# Altium PCB PCB2.PcbDoc
Units mm, origin at the board's own origin, x right, y up, seen from the top; angles counter-clockwise.
Board outline 26.77 x 16.38 mm, 2 copper layers (Top Layer, Bottom Layer); 25 components, 41 nets, 143 pads, 70 vias.
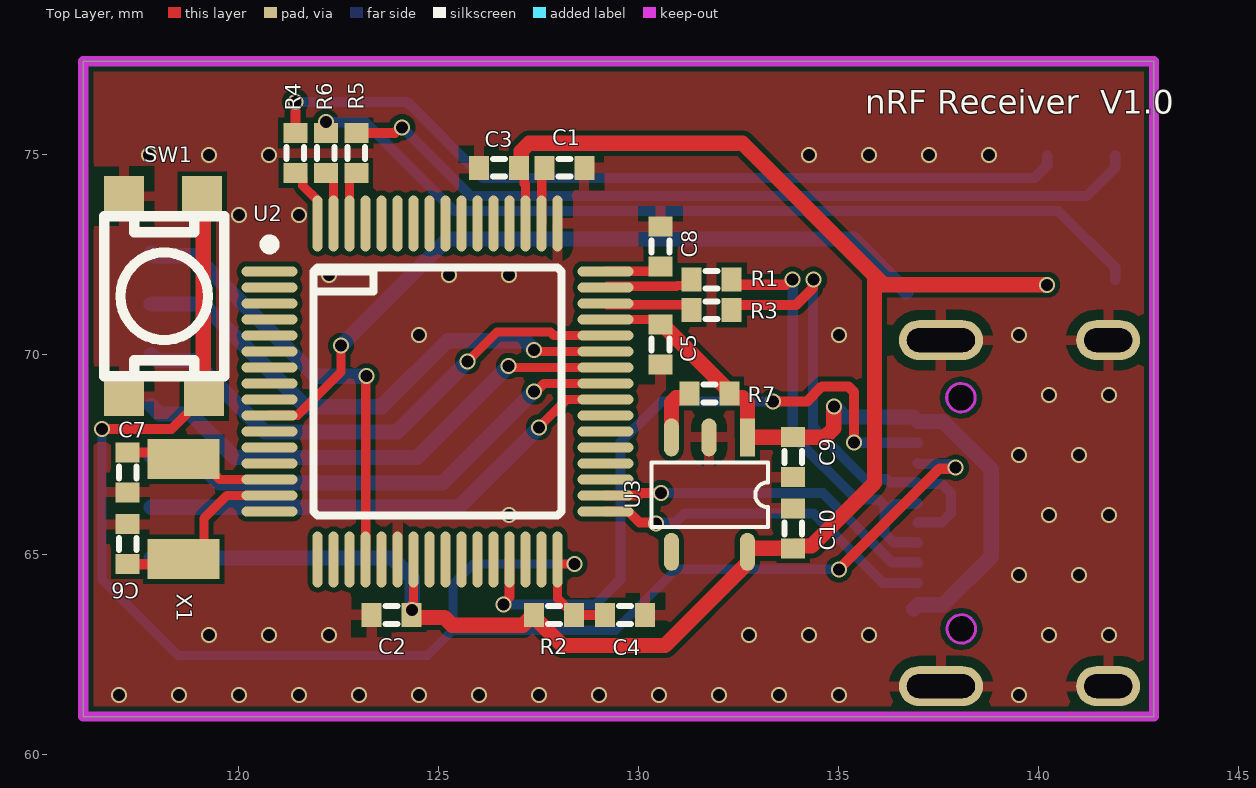
[diagram p0: Top Layer view]
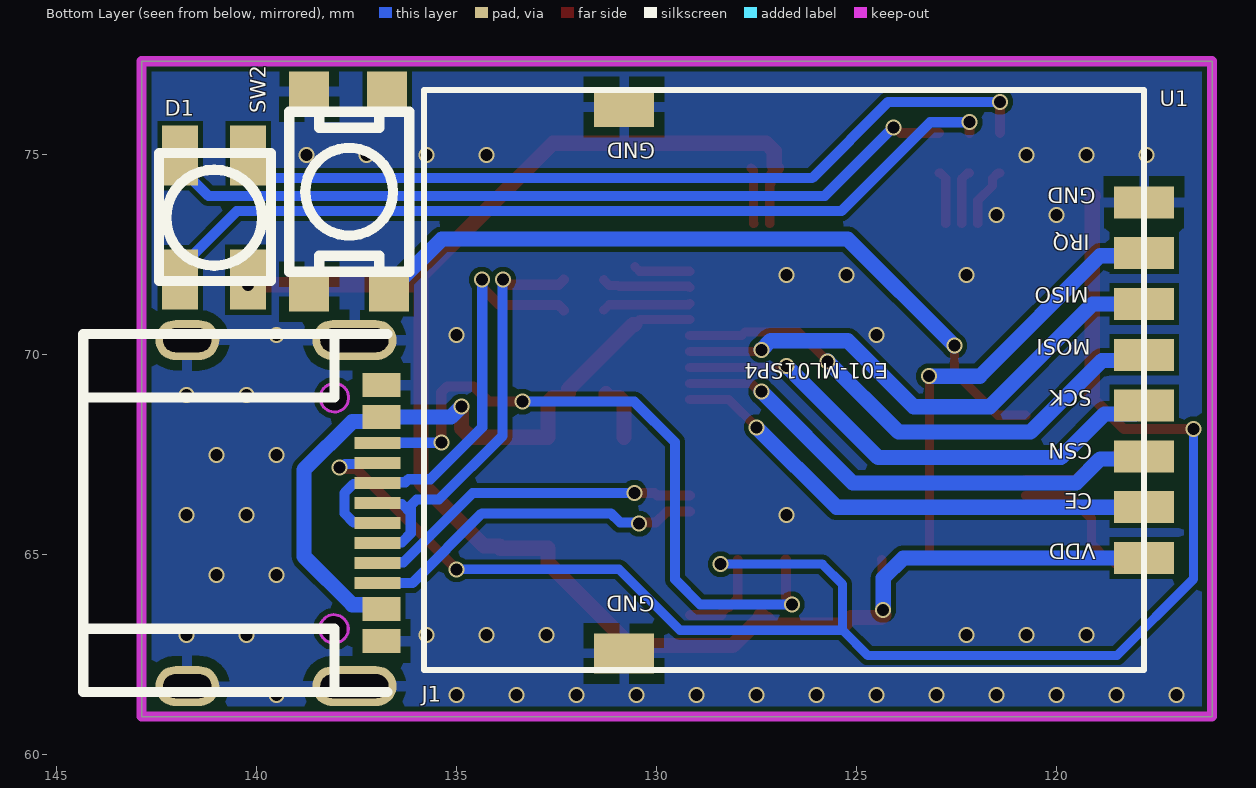
[diagram p1: Bottom Layer view, seen from below]
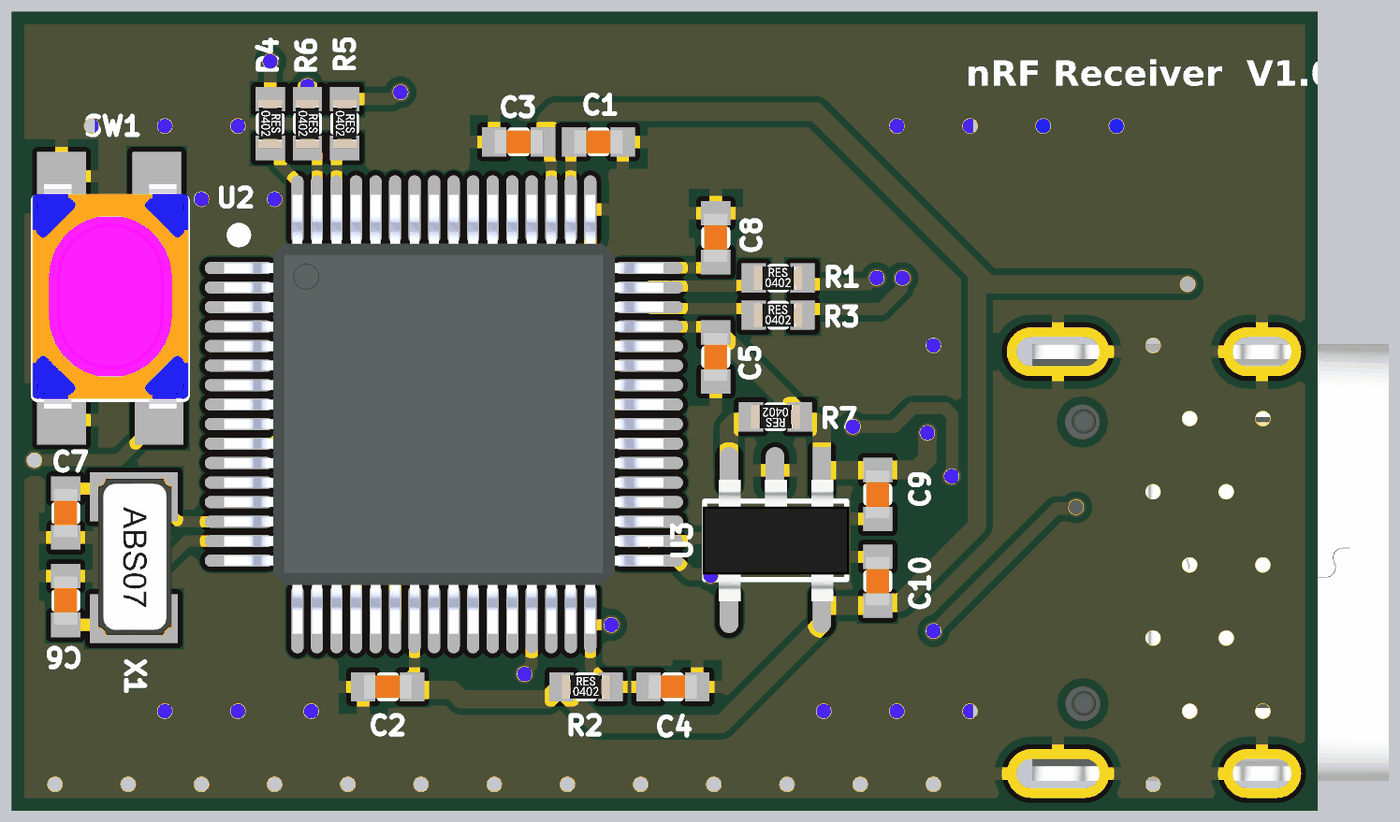
[diagram p2: 3D render of the assembled board from above, using the file's embedded part models]
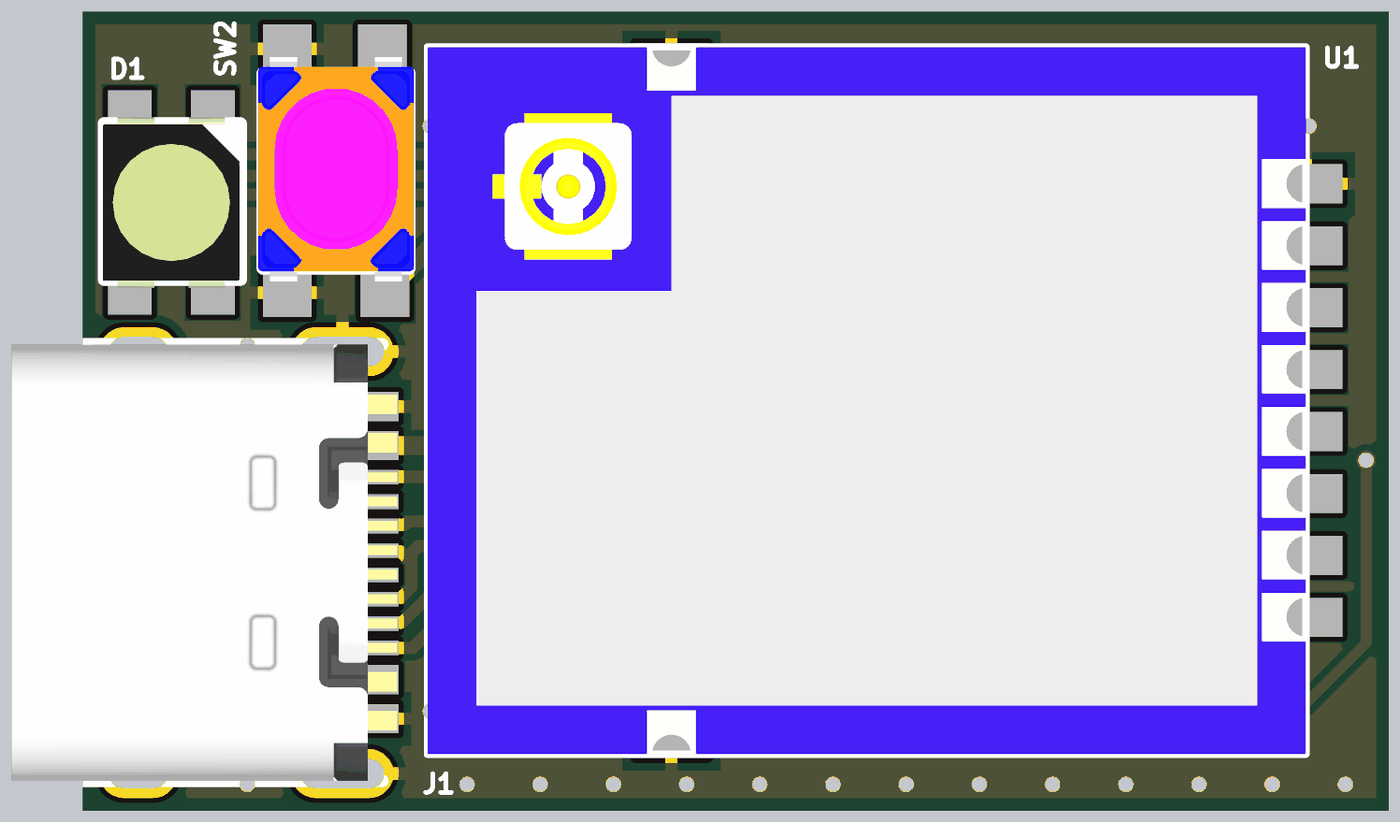
[diagram p3: 3D render of the assembled board from below, using the file's embedded part models]

## Layer stack, top to bottom
Top Solder: solder mask 0.0102, Solder Resist, Dk 3.5
Top Layer: signal copper 0.0356
Dielectric 1: dielectric 0.32, FR-4, Dk 4.8
Bottom Layer: signal copper 0.0356
Bottom Solder: solder mask 0.0102, Solder Resist, Dk 3.5

## Board outline
116.11,60.96 142.875,60.96 142.875,77.343 116.11,77.343

## Design rules (kind name [scope] priority, off if disabled: settings)
Clearance [All] p1: gap=0.127 ignorepadtopadclearanceinfootprint=FALSE
DiffPairsRouting [All] p1: maxlimit=0.254 minlimit=0.066 mostfreqgap=0.254 toplayer_minwidth=0.229 toplayer_maxwidth=0.381 toplayer_prefwidth=0.381 bottomlayer_minwidth=0.229 bottomlayer_maxwidth=0.381 bottomlayer_prefwidth=0.381 maxuncoupledlength=12.7
PolygonConnect [All] p1: connectstyle=Relief reliefconductorwidth=0.254 reliefentries=4 polygonreliefangle="90 Angle" airgapwidth=0.254
RoutingVias [All] p1: holewidth=0.711 width=1.27 viastyle="Through Hole" minholewidth=0.3 minwidth=0.4 maxholewidth=0.711 maxwidth=1.27
SolderMaskExpansion [All] p1: expansion=0.102 istentingtop=FALSE
Width [All] p1: maxlimit=0.381 minlimit=0.229 preferedwidth=0.254
29 further rules are at their usual default settings.

## Classes and differential pairs
net class PB_ADC0_CH[0..4]: PB_ADC0_CH0 PB_ADC0_CH1 PB_ADC0_CH2 PB_ADC0_CH3 PB_ADC0_CH4
component class U_Power: C9 C10 R7 U3
component class U_NRF24L01: U1
component class U_M032: C1 C2 C3 C4 C5 C6 C7 C8 R1 R2 R3 SW1 U2 X1
component class Sheet1: D1 J1 R4 R5 R6 SW2
differential pair MCU_USB_D: +MCU_USB_D_P -MCU_USB_D_N
differential pair USB_D: +USB_D_P -USB_D_N

## Components (designator, comment, footprint, x,y, rotation, side; value= is the part's Value field where it differs from the comment)
C1 "Cap" CAP_0402 127.635,74.676 r0 top value=1uF
C2 "Cap" CAP_0402 124.317,63.5 r180 top value=0.1uF
C3 "Cap" CAP_0402 127,74.676 r180 top value=0.1uF
C4 "Cap" CAP_0402 129.159,63.5 r0 top value=0.1uf
C5 "Cap" CAP_0402 130.54,70.763 r270 top value=1uF
C6 "Cap" CAP_0402 117.221,64.77 r90 top value=20pF
C7 "Cap" CAP_0402 117.221,67.564 r270 top value=20pF
C8 "Cap" CAP_0402 130.54,72.21 r90 top value=1uF
C9 "Cap" CAP_0402 133.858,67.945 r270 top value=1uf
C10 "Cap" CAP_0402 133.858,65.167 r90 top value=1uf
D1 "RGB" 1411_LED 140.208,71.882 r270 bottom
J1 "USB TYPE C" USBC-SMD16F 141.732,70.372 r270 bottom
R1 "Res" RES_0402 131.318,71.882 r0 top value=27
R2 "Res" RES_0402 127.381,63.5 r0 top value=10K
R3 "Res" RES_0402 131.318,71.12 r0 top value=27
R4 "Res" RES_0402 121.412,75.549 r270 top value=1K
R5 "Res" RES_0402 122.936,75.549 r270 top value=1K
R6 "Res" RES_0402 122.174,75.549 r270 top value=1K
R7 "Res" RES_0402 132.261,69.038 r180 top value=100K
SW1 "SPST" "TACK-SW_SMD 2P 4x3mm_2" 119.634,69.469 r180 top
SW2 "SPST" "TACK-SW_SMD 2P 4x3mm_2" 136.184,72.081 r0 bottom
U1 "NRF24L01" NRF24L01P+PA+LNA+IPX 135.81,62.12 r90 bottom
U2 "M032SG8AE" MCU_LQFP_64_7x7 124.968,69.088 r0 top
U3 "AP2112K-3.3TRG1" SOT23-5 133.223,67.31 r270 top
X1 "Xtal" X3215 118.618,67.397 r270 top value=32.768KHz

## Footprints (in the part's own frame and the unit in brackets; to place one, negate y for a bottom-side part, rotate by r counter-clockwise, add the part's x,y. Pads: shape width x height; smd on the part's side, far side on the other; paste and mask are expansions set on the pad)
1411_LED [mm]
  rect 1.5x0.9 smd: 1(0,0) 2(0,-1.7) 3(-3.1,0) 4(-3.1,-1.7)
  silkscreen extent -3.17,-2.23 0.03,0.57, body extent -3.3,-2.25 0.2,0.55, height 1.9
CAP_0402 [mm]
  rect 0.5x0.6 smd: 1(0,0) 2(1,0)
  silkscreen extent 0.35,-0.22 0.65,0.22, body extent 0,-0.25 1,0.25, height 0.48
MCU_LQFP_64_7x7 [mm]
  oval 1.4x0.25 smd: 1(-4.2,3) 2(-4.2,2.6) 3(-4.2,2.2) 4(-4.2,1.8) 5(-4.2,1.4) 6(-4.2,1) 7(-4.2,0.6) 8(-4.2,0.2) 9(-4.2,-0.2) 10(-4.2,-0.6) 11(-4.2,-1) 12(-4.2,-1.4) 13(-4.2,-1.8) 14(-4.2,-2.2) 15(-4.2,-2.6) 16(-4.2,-3) 33(4.2,-3) 34(4.2,-2.6) 35(4.2,-2.2) 36(4.2,-1.8) 37(4.2,-1.4) 38(4.2,-1) 39(4.2,-0.6) 40(4.2,-0.2) 41(4.2,0.2) 42(4.2,0.6) 43(4.2,1) 44(4.2,1.4) 45(4.2,1.8) 46(4.2,2.2) 47(4.2,2.6) 48(4.2,3)
  oval 0.25x1.4 smd: 17(-3,-4.2) 18(-2.6,-4.2) 19(-2.2,-4.2) 20(-1.8,-4.2) 21(-1.4,-4.2) 22(-1,-4.2) 23(-0.6,-4.2) 24(-0.2,-4.2) 25(0.2,-4.2) 26(0.6,-4.2) 27(1,-4.2) 28(1.4,-4.2) 29(1.8,-4.2) 30(2.2,-4.2) 31(2.6,-4.2) 32(3,-4.2) 49(3,4.2) 50(2.6,4.2) 51(2.2,4.2) 52(1.8,4.2) 53(1.4,4.2) 54(1,4.2) 55(0.6,4.2) 56(0.2,4.2) 57(-0.2,4.2) 58(-0.6,4.2) 59(-1,4.2) 60(-1.4,4.2) 61(-1.8,4.2) 62(-2.2,4.2) 63(-2.6,4.2) 64(-3,4.2)
  silkscreen extent -4.32,-3.1 3.1,3.8, body extent -4.5,-4.5 4.5,4.5, height 1.55
NRF24L01P+PA+LNA+IPX [mm]
  rect 0.8x1.5 smd: 1(2.805,-18) 2(4.075,-18) 3(5.345,-18) 4(6.615,-18) 5(7.885,-18) 6(9.155,-18) 7(10.425,-18) 8(11.695,-18)
  rect 1x1.5 smd: 9(14.08,-5) 10(0.42,-5)
  silkscreen extent 0,-18 14.5,0, body extent 0,-18 14.5,0, height 2.6
RES_0402 [mm]
  rect 0.5x0.6 smd: 1(0,0) 2(1,0)
  silkscreen extent 0.35,-0.22 0.65,0.22, body extent 0,-0.25 1,0.25, height 0.35
SOT23-5 [mm]
  rect 0.95x0.38 smd: 1(-0.63,-0.51)
  oval 0.95x0.38 smd: 2(-0.63,-1.47) 3(-0.63,-2.41) 4(2.23,-2.41) 5(2.23,-0.51)
  silkscreen extent 0,-2.91 1.61,0, body extent -0.44,-2.95 2.06,0.05, height 1.09
"TACK-SW_SMD 2P 4x3mm_2" [mm]
  rect 1x1 smd: 1(0.5,0.5) 1(0.55,-4.5) 2(2.5,0.5) 2(2.5,-4.5)
  silkscreen extent 0,-4 3,0, body extent -0.1,-4.33 3.1,0.26, height 2.5
USBC-SMD16F [mm]
  rect 0.6x0.95 smd: 1(1.125,4.86) 2(1.925,4.86) 11(6.725,4.86) 12(7.525,4.86)
  rect 0.3x1.15 smd: 3(2.575,4.76) 4(3.075,4.76) 5(3.575,4.76) 6(4.075,4.76) 7(4.575,4.76) 8(5.075,4.76) 9(5.575,4.76) 10(6.075,4.76)
  oval 1x1.6 hole 0.6 slot 1.2 at 90 deg: GND(0,0) GND(8.65,0)
  oval 1x2.1 hole 0.6 slot 1.7 at 90 deg: GND(0,4.18) GND(8.65,4.18)
  Keep-Out Layer board cut-out: 1.44,3.324 1.304,3.351 1.189,3.429 1.111,3.544 1.084,3.68 1.084,3.68 1.111,3.816 1.189,3.931 1.304,4.009 1.44,4.036 1.44,4.036 1.576,4.009 1.691,3.931 1.769,3.816 1.796,3.68 1.796,3.68 1.769,3.544 1.691,3.429 1.576,3.351 1.44,3.324
  Keep-Out Layer board cut-out: 6.864,3.67 6.891,3.534 6.969,3.419 7.084,3.341 7.22,3.314 7.22,3.314 7.356,3.341 7.471,3.419 7.549,3.534 7.576,3.67 7.576,3.67 7.549,3.806 7.471,3.921 7.356,3.999 7.22,4.026 7.22,4.026 7.084,3.999 6.969,3.921 6.891,3.806 6.864,3.67
  Keep-Out Layer circle w0.076: c7.22,3.67 r0.356
  Keep-Out Layer circle w0.076: c1.44,3.68 r0.356
  silkscreen extent -0.15,-2.6 8.8,5, body extent -0.15,-2.6 8.8,5.3, height 3.16
X3215 [mm]
  rect 1x1.8 smd: 1(0,0) 2(2.5,0)
  body extent -0.38,-0.74 2.84,0.78, height 0.91

## Part data
D1: library part LED_1411
J1: "USB Shielded I/O Receptacle; Type C; Right Angle; Surface Mount; Gold over Nickel", Case/Package=0101, Current Rating=5A, Flammability Rating="UL94 V-0", Insulation Color=Black, Manufacturer=Molex, Manufacturer Part Number=105450-0101, Max Operating Temperature=85°C, Min Operating Temperature=-30°C, Supplier Part Number 1=WM12856DKR-ND, Category=Connectors, ComponentLink1Description=http://www.farnell.com/datasheets/2801634.pdf?src-supplier=Farnell, ComponentLink1URL=http://www.farnell.com/datasheets/2801634.pdf?src-supplier=Farnell, ComponentLink2Description=http://www.farnell.com/datasheets/2672741.pdf?src-supplier=Newark, ComponentLink2URL=http://www.farnell.com/datasheets/2672741.pdf?src-supplier=Newark, ComponentLink3Description=http://www.farnell.com/datasheets/2015275.pdf?src-supplier=Element14, ComponentLink3URL=http://www.farnell.com/datasheets/2015275.pdf?src-supplier=Element14, ComponentLink4Description=https://www.molex.com/pdm_docs/ps/PS-105448-001.pdf?src-supplier=Digi-Key, ComponentLink4URL=https://www.molex.com/pdm_docs/ps/PS-105448-001.pdf?src-supplier=Digi-Key, ComponentLink5Description=http://www.farnell.com/datasheets/2801634.pdf?src-supplier=Newark, ComponentLink5URL=http://www.farnell.com/datasheets/2801634.pdf?src-supplier=Newark, ComponentLink6Description=https://www.molex.com/pdm_docs/sd/1054500101_sd.pdf?src-supplier=Digi-Key, ComponentLink6URL=https://www.molex.com/pdm_docs/sd/1054500101_sd.pdf?src-supplier=Digi-Key, ComponentLink7Description=http://www.farnell.com/datasheets/2801634.pdf?src-supplier=Element14, ComponentLink7URL=http://www.farnell.com/datasheets/2801634.pdf?src-supplier=Element14, ComponentLink8Description=http://www.literature.molex.com/SQLImages/kelmscott/Molex/PDF_Images/987651-4081.PDF?src-supplier=Avnet, ComponentLink8URL=http://www.literature.molex.com/SQLImages/kelmscott/Molex/PDF_Images/987651-4081.PDF?src-supplier=Avnet, ComponentLink9Description=http://www.literature.molex.com/SQLImages/kelmscott/Molex/PDF_Images/987651-4081.PDF?src-supplier=Avnet+Asia, ComponentLink9URL=http://www.literature.molex.com/SQLImages/kelmscott/Molex/PDF_Images/987651-4081.PDF?src-supplier=Avnet+Asia, Connector Type=USB, Contact Material="Copper Alloy", Contact Plating=Gold, Features=Shielded, Gender=Receptacle, Housing Material=Thermoplastic, Length=8.94mm, Mating Cycles=10000, Mount="Surface Mount,Through Hole,Horizontal", Number of Contacts=24, Number of Pins=24, Number of Ports=1, Number of Terminals=24, Orientation="Right Angle", Packaging="Tape and Reel", Pitch=0.5mm, Pricing 1="1=2.15000, 10=1.94900, 25=1.82960, 50=1.75000, 100=1.67050, 250=1.51140, 500=1.39208 (USD)", REACH SVHC=Unknown, RoHS=Yes, Shielding=Shielded, Stock 1=21711, Supplier 1=Digi-Key, Termination=Solder, USB Standard="USB 3.1"
SW1 SW2: library part Switch_Button1
U1: library part NRF24L01_module
U3: "IC REG LINEAR 3.3V 600MA SOT23-5", Case/Package=SOT-23-5, Dropout Voltage=250mV, Manufacturer=Diodes, Max Input Voltage=6V, Max Operating Temperature=85°C, Max Output Current=600mA, Min Input Voltage=2.5V, Min Operating Temperature=-40°C, Output Voltage=3.3V, Package Quantity=1, Quiescent Current=55uA, Supplier Part Number 1=AP2112K-3.3TRG1DICT-ND, Accuracy=1.5%, Category="Voltage Regulators - Linear", ComponentLink1Description=https://datasheet.ciiva.com/29569/ap2112-29569919.pdf?src-supplier=Digi-Key, ComponentLink1URL=https://datasheet.ciiva.com/29569/ap2112-29569919.pdf?src-supplier=Digi-Key, ComponentLink2Description=https://datasheet.ciiva.com/30016/ap2112-30016792.pdf?src-supplier=Avnet, ComponentLink2URL=https://datasheet.ciiva.com/30016/ap2112-30016792.pdf?src-supplier=Avnet, ComponentLink3Description=https://datasheet.ciiva.com/29569/ap2112-29569917.pdf?src-supplier=Digi-Key, ComponentLink3URL=https://datasheet.ciiva.com/29569/ap2112-29569917.pdf?src-supplier=Digi-Key, ComponentLink4Description=https://datasheet.ciiva.com/29569/ap2112-29569918.pdf?src-supplier=Digi-Key, ComponentLink4URL=https://datasheet.ciiva.com/29569/ap2112-29569918.pdf?src-supplier=Digi-Key, Height=1.3mm, Lead Free="Lead Free", Length=3.1mm, Manufacturer Part Number=AP2112K-3.3TRG1, Mount="Surface Mount", Number of Outputs=1, Number of Pins=5, Number of Regulators=1, Output Current=600mA, Output Type=Fixed, Packaging="Tape and Reel", Polarity=Positive, Pricing 1="1=0.47000, 10=0.35500, 25=0.32000, 100=0.17450, 250=0.16872, 500=0.15126, 1000=0.11636 (USD)", RoHS=Yes, Stock 1=54786, Supplier 1=Digi-Key, Width=1.7mm

## Via types
v1: diameter 0.4, hole 0.3, Top Layer to Bottom Layer, tented both sides, 70 vias

## Nets (pads, with @x,y where several pads share a name; then routed paths per layer and width w, separated by ;. In a path a pad name is that pad's centre, name@x,y a point inside that pad or via, vN(x,y) a via of type N, cw(c..) or ccw(c..) an arc to the next point about the centre after c; other vN are vias at no path point)
CE: U1.2 U2.40 | length 12.5
  Top Layer w0.229: v1(127.499,68.19) 128.197,68.888 U2.40
  Bottom Layer w0.381: U1.2 125.504,66.195 v1(127.499,68.19)
FP0_ICE_DAT: J1.10 U2.33 | length 8.8
  Top Layer w0.254: U2.33 129.739,66.088 130.017,65.81 130.405,65.81 v1(130.433,65.782)
  Bottom Layer w0.254: v1(130.433,65.782) 130.46,65.81 130.911,65.81 131.141,66.04 134.366,66.04 136.109,64.297 J1.10
FP1_ICE_CLK: J1.9 U2.34 | length 8.6
  Top Layer w0.254: U2.34 129.17,66.49 129.99,66.49 130.048,66.548 v1(130.556,66.548)
  Bottom Layer w0.254: v1(130.556,66.548) 134.598,66.548 136.326,64.82 136.949,64.82 J1.9
GND: C1.2 C2.2 C3.2 C4.2 C5.2 C6.2 C7.2 C8.2 C9.2 C10.2 J1.1 J1.12 J1.GND SW1.2 SW2.2 U1.8 U1.9 U1.10 U2.22 U2.49 U3.2
  other v1: 117,61.5 118.5,61.5 120,61.5 121.5,61.5 123,61.5 124.5,61.5 126,61.5 127.5,61.5 129,61.5 130.5,61.5 132,61.5 133.5,61.5 135,61.5 139.5,61.5 119.25,63 120.75,63 122.25,63 132.75,63 134.25,63 135.75,63 140.25,63 141.75,63 139.5,64.5 141,64.5 126.75,66 140.25,66 141.75,66 139.5,67.5 141,67.5 140.25,69 141.75,69 124.5,70.5 135,70.5 139.5,70.5 122.25,72 125.25,72 126.75,72 120,73.5 121.5,73.5 117.75,75 119.25,75 120.75,75 134.25,75 135.75,75 137.25,75 138.75,75
INT: U1.7 U2.20 | length 11.2
  Top Layer w0.229: U2.20 123.172,64.892 123.172,69.451 v1(123.19,69.469)
  Bottom Layer w0.381: U1.7 117.874,72.481 118.908,72.481 121.92,69.469 v1(123.19,69.469)
LDO_CAP: C1.1 U2.50 | length 1.4
  Top Layer w0.229: U2.50 127.572,73.292 127.572,74.613 C1.1
LED_B: R6.2 U2.63 | length 1.4
  Top Layer w0.229: R6.2 122.224,74.549 122.368,74.405 U2.63
LED_G: R5.2 U2.62 | length 1.3
  Top Layer w0.229: U2.62 122.768,74.413 122.904,74.549 R5.2
LED_R: R4.2 U2.64 | length 1.5
  Top Layer w0.229: R4.2 121.462,74.549 121.598,74.413 121.598,74.233 121.968,73.863 U2.64
MCU_USB_D_N: R3.1 U2.46 | length 2.2
  Top Layer w0.229: U2.46 129.201,71.255 131.183,71.255 R3.1
MCU_USB_D_P: R1.1 U2.47 | length 2.2
  Top Layer w0.229: U2.47 129.199,71.719 130.94,71.719 130.958,71.737 131.182,71.737 131.318,71.873 R1.1
MCU_VDD: C2.1 C3.1 C10.1 D1.1 R2.1 U1.1 U2.23 U2.51 U3.5 | length 44.9
  Top Layer w0.229: C2.1 124.317,63.753 124.364,63.8 124.364,64.884 U2.23 ; C3.1 127.136,74.54 127.136,74.286 127.159,74.263 127.159,74.26 127.168,74.252 U2.51
  Top Layer w0.381: v1(124.333,63.627) 124.333,63.516 C2.1 124.317,63.496 124.377,63.437 125.139,63.437 125.329,63.246 127.098,63.246 127.243,63.391 127.322,63.391 R2.1@127.381,63.45 ; C3.1 127.059,74.735 127.059,75.1 127.253,75.293 132.588,75.293 135.89,71.991 ; R2.1 R2.1@127.381,63.45 ; C10.1 133.917,65.226 134.314,65.226 135.89,66.802 135.89,71.991 ; C10.1@133.908,65.167 132.714,65.167 132.714,64.796 130.655,62.738 128.093,62.738 R2.1@127.381,63.45 ; v1(140.208,71.755) 136.126,71.755 135.89,71.991
  Bottom Layer w0.381: U1.1 123.83,64.925 124.333,64.422 v1(124.333,63.627)
NetD1_2: D1.2 R6.1 | length 21.8
  Top Layer w0.254: R6.1 v1(122.174,75.819)
  Bottom Layer w0.254: v1(122.174,75.819) 123.161,75.819 125.383,73.597 140.493,73.597 141.908,72.182 D1.2
NetD1_3: D1.3 R4.1 | length 20.7
  Top Layer w0.254: R4.1 v1(121.412,76.327)
  Bottom Layer w0.254: v1(121.412,76.327) 124.206,76.327 126.111,74.422 139.885,74.422 140.208,74.745 D1.3
NetD1_4: D1.4 R5.1 | length 20.3
  Top Layer w0.254: R5.1 123.896,75.549 124.039,75.692 v1(124.079,75.692)
  Bottom Layer w0.254: v1(124.079,75.692) 125.793,73.978 141.204,73.978 141.908,74.682 D1.4
NetR7_2: R7.2 U3.3 | length 1.4
  Top Layer w0.381: U3.3 130.813,68.815 130.927,68.929 131.201,68.929 131.261,68.988 R7.2
nRESET: C4.1 J1.4 R2.2 SW1.1 U2.32 | length 43.9
  Top Layer w0.229: U2.32 U2.32@127.968,64.78 ; R2.2 128.381,63.55 128.245,63.686 128.195,63.686 127.968,63.913 U2.32@127.968,64.78 ; v1(128.397,64.77) 127.978,64.77 U2.32@127.968,64.78
  Top Layer w0.254: v1(116.577,68.147) 116.581,68.151 118.316,68.151 SW1.1@119.134,68.969 ; R2.2 C4.1 ; v1(135.001,64.643) 137.513,67.155 137.894,67.155 v1(137.922,67.183)
  Top Layer w0.381: SW1.1@119.084,73.969 119.109,73.944 119.109,68.994 SW1.1@119.134,68.969
  Bottom Layer w0.229: v1(116.577,68.147) 116.577,64.398 118.491,62.484 124.714,62.484 125.349,63.119 ; v1(128.397,64.77) 125.857,64.77 125.349,64.262 125.349,63.119 ; v1(135.001,64.643) 130.937,64.643 129.413,63.119 125.349,63.119
  Bottom Layer w0.254: J1.4 136.995,67.274 137.791,67.274 137.882,67.183 v1(137.922,67.183)
PA0_UART0_RXD: U2.30
PA1_UART0_TXD: J1.3 U2.29 | length 17.1
  Top Layer w0.254: v1(126.619,63.763) 126.619,63.803 126.766,63.95 126.766,64.886 U2.29 ; v1(133.35,68.834) 134.195,68.834 134.576,69.215 135.233,69.215 135.382,69.066 135.382,67.827 v1(135.373,67.818)
  Bottom Layer w0.254: v1(126.619,63.763) 128.914,63.763 129.54,64.389 129.54,67.818 130.556,68.834 v1(133.35,68.834) ; v1(135.373,67.818) 135.383,67.808 136.962,67.808 J1.3
PA4_I2C0_SCL: U2.26
PA5_I2C0_SDA: U2.25
PA6_INT0: U2.21
PA8_IO_V33EN: U2.11
PA9_IO_BTM: SW2.1@136.684,71.581 U2.10 | length 18.7
  Top Layer w0.229: U2.10 120.772,68.492 121.465,68.492 122.555,69.582 v1(122.555,70.231)
  Bottom Layer w0.381: v1(122.555,70.231) 125.222,72.898 135.367,72.898 SW2.1@136.684,71.581
PB14_IO_CHRG: U2.54
PB15_IO_STDBY: U2.53
PB_ADC0_CH0: U2.7
PB_ADC0_CH1: U2.6
PB_ADC0_CH2: U2.5
PB_ADC0_CH3: U2.4
PB_ADC0_CH4: U2.3
PD0_SPI0_MOSI: U1.5 U2.44 | length 13.2
  Top Layer w0.229: v1(125.721,69.841) 126.451,70.571 127.792,70.571 127.875,70.488 U2.44
  Bottom Layer w0.381: U1.5 117.955,69.86 118.862,69.86 120.65,68.072 123.952,68.072 v1(125.721,69.841)
PD1_SPI0_MISO: U1.6 U2.43 | length 13.2
  Top Layer w0.229: v1(127.381,70.129) 127.427,70.129 127.469,70.088 U2.43
  Bottom Layer w0.381: U1.6 119.098,71.275 121.666,68.707 123.571,68.707 125.222,70.358 127.147,70.358 127.376,70.129 v1(127.381,70.129)
PD2_SPI0_CLK: U1.4 U2.42 | length 12.9
  Top Layer w0.229: v1(126.746,69.723) 126.792,69.723 126.827,69.688 U2.42
  Bottom Layer w0.381: U1.4 118.018,68.527 118.798,68.527 119.888,67.437 124.46,67.437 v1(126.746,69.723)
PD3_SPI0_SS: U1.3 U2.41 | length 12.7
  Top Layer w0.229: v1(127.381,69.088) 127.427,69.088 127.627,69.288 U2.41
  Bottom Layer w0.381: U1.3 117.874,67.401 118.908,67.401 119.507,66.802 125.095,66.802 v1(127.381,69.088)
PF4_X32_OUT: C6.1 U2.15 X1.2 | length 4.6
  Top Layer w0.229: X1.2 118.74,64.897 119.126,65.283 119.126,65.913 119.701,66.488 U2.15
  Top Layer w0.254: C6.1 118.491,64.77 X1.2
PF5_X32_IN: C7.1 U2.14 X1.1 | length 3.8
  Top Layer w0.229: X1.1 119.018,67.397 119.527,66.888 U2.14
  Top Layer w0.254: C7.1 118.451,67.564 X1.1
USB_CAP: C8.1 U2.48 | length 1.4
  Top Layer w0.229: U2.48 129.172,72.092 130.421,72.092 C8.1
USB_D_N: J1.5 J1.7 R3.2 | length 11.7
  Top Layer w0.254: R3.2 132.318,71.124 132.441,71.247 133.922,71.247 134.347,71.672 134.347,71.863 v1(134.366,71.882)
  Bottom Layer w0.254: v1(134.366,71.882) 134.366,71.779 134.357,71.769 134.357,68.192 135.655,66.893 136.205,66.893 136.278,66.82 136.949,66.82 136.995,66.774 137.579,66.774 137.801,66.552 137.801,66.042 137.579,65.82 136.995,65.82 J1.7
USB_D_P: J1.6 J1.8 R1.2 | length 11.1
  Top Layer w0.254: R1.2 132.318,71.878 132.441,71.755 133.672,71.755 133.799,71.882 v1(133.839,71.882)
  Bottom Layer w0.254: v1(133.839,71.882) 133.849,71.873 133.849,67.982 135.445,66.385 135.994,66.385 136.143,66.236 136.143,66.052 ; J1.8 136.949,65.32 136.365,65.32 136.143,65.542 136.143,66.052 ; J1.6 136.949,66.274 136.365,66.274 136.143,66.052
USB_VBUS: C5.1 C9.1 J1.2 J1.11 R7.1 U2.45 U3.1 | length 17.4
  Top Layer w0.229: U2.45 129.172,70.884 130.419,70.884 C5.1
  Top Layer w0.381: C5.1 130.59,70.763 132.201,69.152 132.201,69.048 132.32,68.929 132.599,68.929 132.713,68.815 132.713,67.942 U3.1 ; U3.1@132.714,67.943 133.856,67.943 C9.1 134.651,67.945 134.874,68.168 v1(134.874,68.707)
  Bottom Layer w0.381: v1(134.874,68.707) 134.879,68.707 135.136,68.45 136.869,68.45 136.981,68.338 137.606,68.338 138.811,67.132 138.811,64.962 137.606,63.757 136.981,63.757 J1.11
pads on no net: SW2.1@136.734,76.581 U2.1 U2.2 U2.8 U2.9 U2.12 U2.13 U2.16 U2.17 U2.18 U2.19 U2.24 U2.27 U2.28 U2.31 U2.35 U2.36 U2.37 U2.38 U2.39 U2.52 U2.55 U2.56 U2.57 U2.58 U2.59 U2.60 U2.61 U3.4

## Polygon pours and split planes (outlines as drawn)
GND on Bottom Layer "GND_L02_P002" (solid, pour order 2): 116.23,77.216 142.748,77.216 142.748,61.087 116.23,61.087
GND on Top Layer "GND_L01_P001" (solid, pour order 1): 116.23,77.216 142.748,77.216 142.748,61.087 116.23,61.087

## Keep-outs
Keep-Out Layer:
  the board outline again, w0.254

## Silkscreen, mask and mechanical layers (free items; w line width, h text height)
Top Overlay:
  text "nRF Receiver  V1.0" at 135.661,75.828 h1.02

## Text inside footprints (layer, text, board x,y; h text height)
U1: Bottom Overlay "E01-ML01SP4" at 124.209,69.791 h0.38 r180; Bottom Overlay "GND" at 130.029,75.305 h0.38 r180; Bottom Overlay "GND" at 130.039,63.975 h0.38 r180; Bottom Overlay "VDD" at 119.024,65.285 h0.38 r180; Bottom Overlay "CE" at 119.104,66.545 h0.38 r180; Bottom Overlay "CSN" at 119.104,67.795 h0.38 r180; Bottom Overlay "SCK" at 119.124,69.115 h0.38 r180; Bottom Overlay "MOSI" at 119.144,70.395 h0.38 r180; Bottom Overlay "MISO" at 119.194,71.695 h0.38 r180; Bottom Overlay "IRQ" at 119.174,73.005 h0.38 r180; Bottom Overlay "GND" at 119.024,74.185 h0.38 r180